# EAGLE board NodeGeneric (EAGLE 4.16)

Size 99.06 x 74.93 mm. Coordinates in mm from the lower left corner, seen from the top.
Outline: 0,0 0,74.93 99.06,74.93 99.06,0 0,0
Copper layers (1*16): Top 0.035mm / dielectric 1.5mm / Bottom 0.035mm
Design rules "8mils": minimum track width 10mil, minimum drill 24mil, track to track 8mil, track to pad 8mil, pad to pad 8mil, via to via 8mil, smd to smd 8mil, copper to edge 40mil, drill to drill 10mil, minimum pad ring 10mil, minimum via ring 8mil, stop-mask expansion 0mil, vias tented up to drill 0mil, thermal gap 10mil

## Footprints (pad centres in the part's own frame; a part is rotated, then mirrored left to right if it is on the bottom)
SOT223 = smd 1.219 x 2.235: 1 -2.311,-3.099; 2 0,-3.099; 3 2.311,-3.099 | smd 3.6 x 2.2: 4 0,3.099
C0603 = smd 1.1 x 1: 1 -0.85,0; 2 0.85,0
SANYO-OSCON_SMD_A5 = smd 2.6 x 1.6: + 1.8,0; - -1.8,0
SANYO-OSCON_SMD_C6 = smd 3.5 x 1.6: + 2.8,0; - -2.8,0
SANYO-OSCON_SMD_E7 = smd 4.15 x 1.9: + 3.5,0; - -3.5,0
LQFP48 = smd 0.65 x 2.4: 1 -7.62,-10.6; 2 -6.35,-10.6; 3 -5.08,-10.6; 4 -3.81,-10.6; 5 -2.54,-10.6; 6 -1.27,-10.6; 7 0,-10.6; 8 1.27,-10.6; 9 2.54,-10.6; 10 3.81,-10.6; 11 5.08,-10.6; 12 6.35,-10.6; 25 6.35,9.33; 26 5.08,9.33; 27 3.81,9.33; 28 2.54,9.33; 29 1.27,9.33; 30 0,9.33; 31 -1.27,9.33; 32 -2.54,9.33; 33 -3.81,9.33; 34 -5.08,9.33; 35 -6.35,9.33; 36 -7.62,9.33 | smd 2.4 x 0.65: 13 9.33,-7.62; 14 9.33,-6.35; 15 9.33,-5.08; 16 9.33,-3.81; 17 9.33,-2.54; 18 9.33,-1.27; 19 9.33,0; 20 9.33,1.27; 21 9.33,2.54; 22 9.33,3.81; 23 9.33,5.08; 24 9.33,6.35; 37 -10.6,6.35; 38 -10.6,5.08; 39 -10.6,3.81; 40 -10.6,2.54; 41 -10.6,1.27; 42 -10.6,0; 43 -10.6,-1.27; 44 -10.6,-2.54; 45 -10.6,-3.81; 46 -10.6,-5.08; 47 -10.6,-6.35; 48 -10.6,-7.62
SSOP28 = smd 0.4 x 1.5: 1 -4.225,-3.625; 2 -3.575,-3.625; 3 -2.925,-3.625; 4 -2.275,-3.625; 5 -1.625,-3.625; 6 -0.975,-3.625; 7 -0.325,-3.625; 8 0.325,-3.625; 9 0.975,-3.625; 10 1.625,-3.625; 11 2.275,-3.625; 12 2.925,-3.625; 13 3.575,-3.625; 14 4.225,-3.625; 15 4.225,3.625; 16 3.575,3.625; 17 2.925,3.625; 18 2.275,3.625; 19 1.625,3.625; 20 0.975,3.625; 21 0.325,3.625; 22 -0.325,3.625; 23 -0.975,3.625; 24 -1.625,3.625; 25 -2.275,3.625; 26 -2.925,3.625; 27 -3.575,3.625; 28 -4.225,3.625
1X02 = drill 1.016 long: 1 -1.27,0; 2 1.27,0
JTAG-ARM = drill 0.914 round: 1 -11.43,-1.27 | drill 0.914 octagon: 2 -11.43,1.27; 3 -8.89,-1.27; 4 -8.89,1.27; 5 -6.35,-1.27; 6 -6.35,1.27; 7 -3.81,-1.27; 8 -3.81,1.27; 9 -1.27,-1.27; 10 -1.27,1.27; 11 1.27,-1.27; 12 1.27,1.27; 13 3.81,-1.27; 14 3.81,1.27; 15 6.35,-1.27; 16 6.35,1.27; 17 8.89,-1.27; 18 8.89,1.27; 19 11.43,-1.27; 20 11.43,1.27
CHIPLED_0603 = smd 0.8 x 0.8: A 0,-0.75; C 0,0.75
05P = drill 0.914 long: 1 -5.08,0; 2 -2.54,0; 3 0,0; 4 2.54,0; 5 5.08,0
HC49/S = drill 0.813 round: 1 -2.413,0; 2 2.413,0
R0603 = smd 1 x 1.1: 1 -0.85,0; 2 0.85,0
SOT23 = smd 1 x 1.4: 1 -0.95,-1.1; 2 0.95,-1.1; 3 0,1.1
QFN32 = smd 0.711 x 0.279: 1 -2.376,1.75; 2 -2.376,1.25; 3 -2.376,0.75; 4 -2.376,0.25; 5 -2.376,-0.25; 6 -2.376,-0.75; 7 -2.376,-1.25; 8 -2.376,-1.75; 17 2.376,-1.75; 18 2.376,-1.25; 19 2.376,-0.75; 20 2.376,-0.25; 21 2.376,0.25; 22 2.376,0.75; 23 2.376,1.25; 24 2.376,1.75 | smd 0.279 x 0.711: 9 -1.75,-2.376; 10 -1.25,-2.376; 11 -0.75,-2.376; 12 -0.25,-2.376; 13 0.25,-2.376; 14 0.75,-2.376; 15 1.25,-2.376; 16 1.75,-2.376; 25 1.75,2.376; 26 1.25,2.376; 27 0.75,2.376; 28 0.25,2.376; 29 -0.25,2.376; 30 -0.75,2.376; 31 -1.25,2.376; 32 -1.75,2.376 | smd 2.54 x 2.54: EXP 0,0
USB_MINI_B = smd 2.286 x 0.508: P$1 1.14,1.6; P$2 1.14,0.8; P$3 1.14,0; P$4 1.14,-0.8; P$5 1.14,-1.6 | hole 1.016: -1.2,2.2; -1.2,-2.2

## Placement (x,y rotation side)
B_CH1  BSP75N  [SOT223]  86.23,6.73 90 top
B_CH2  BSP75N  [SOT223]  76.58,6.73 90 top
C1  100nF  [C0603]  38.23,11.68 90 top
C2  39pF  [C0603]  57.28,24.26 270 top
C3  39pF  [C0603]  57.28,19.43 90 top
C4  10nF  [C0603]  8.51,39.5 0 bottom
C5  47pF  [C0603]  8.51,34.67 0 bottom
C6  47pF  [C0603]  8.51,36.96 0 bottom
C7  100nF  [C0603]  16.64,40.01 0 top
C8  100nF  [C0603]  16.64,37.72 180 top
C9  4.7uF  [SANYO-OSCON_SMD_A5]  12.57,39.88 270 top
C10  10uF  [SANYO-OSCON_SMD_C6]  6.35,4.7 0 top
C11  47uF  [SANYO-OSCON_SMD_E7]  6.99,13.46 0 top
C12  470uF  [SANYO-OSCON_SMD_E7]  7.11,22.73 0 top
C13  10nF  [C0603]  4.83,29.21 180 top
C14  100nF  [C0603]  43.43,16.38 90 top
C15  100nF  [C0603]  40.89,16.38 270 top
C16  100nF  [C0603]  58.8,29.21 90 top
C17  100nF  [C0603]  56.26,29.21 270 top
C18  100nF  [C0603]  29.97,29.97 270 top
G_CH1  BSP75N  [SOT223]  86.23,14.86 90 top
G_CH2  BSP75N  [SOT223]  76.58,14.86 90 top
IC1  LPC2103  [LQFP48]  43.56,30.86 0 top
IC2  FT232RL  [SSOP28]  22.99,36.83 90 top
IC4  [SOT223]  17.78,4.7 270 top
IC5  [SOT223]  17.78,13.46 270 top
JP1  [1X02]  13.34,28.96 0 top
JP2  [1X02]  54.99,43.81 0 top
JTAG  JTAG-ARM  [JTAG-ARM]  44.58,5.08 180 top
LED_GREEN  [CHIPLED_0603]  16.13,35.31 270 top
LED_RED  [CHIPLED_0603]  16.13,33.02 270 top
LM1  [05P]  94.49,21.72 270 top
LM2  [05P]  94.49,8.13 270 top
Q1  14.7456MHz  [HC49/S]  61.21,20.95 270 top
R1  0  [R0603]  61.59,4.95 90 top
R2  100k  [R0603]  53.47,11.68 90 top
R3  100k  [R0603]  50.93,11.68 90 top
R4  100k  [R0603]  48.39,11.68 90 top
R5  100k  [R0603]  43.31,11.68 90 top
R6  100k  [R0603]  40.77,11.68 270 top
R7  100k  [R0603]  45.85,11.68 270 top
R8  10k  [R0603]  35.69,11.68 270 top
R9  10k  [R0603]  33.15,11.68 270 top
R10  10k  [R0603]  30.61,11.68 90 top
R11  270R  [R0603]  12.95,33.02 180 top
R12  270R  [R0603]  12.95,35.31 180 top
R13  22k  [R0603]  46.48,43.81 0 top
R14  390  [R0603]  16.13,24.26 0 top
R15  240  [R0603]  16,20.7 0 top
R16  100  [R0603]  20.95,23.88 0 top
R17  220  [R0603]  21.21,20.83 0 top
R_CH1  BSP75N  [SOT223]  86.23,22.99 90 top
R_CH2  BSP75N  [SOT223]  76.58,22.99 90 top
U$1  MPC130T  [SOT23]  27.43,11.43 180 top
U$2  MC13202  [QFN32]  60.73,54.25 0 top
U$8  USB_MINI_B  [USB_MINI_B]  6.6,36.96 0 top

## Library data of the parts
B_CH1 B_CH2 G_CH1 G_CH2 IC1 IC4 IC5 R_CH1 R_CH2 U$1 U$2 = my-library
C1-C18 R1-R17 = rcl
IC2 = ftdichip
JP1 JP2 = pinhead
JTAG = philips-6
LED_GREEN LED_RED = led
LM1 LM2 = con-amp-quick
Q1 = crystal
U$8 = mgs

## Nets
+1V8: C10.+ C14.2 C15.1 IC1.5 IC5.2 R17.1
+3V3: C1.1 C11.+ C16.1 C17.2 IC1.17 IC1.40 IC4.2 JP2.2 JTAG.1 R1.2 R2.2 R3.2 R4.2 R5.2 R6.2 R10.1 R15.1 U$1.2
+5V: C4.1 C8.1 C9.+ IC2.20 JP1.1 R11.2 R12.2 U$8.P$1
+12V: LM1.1 LM2.1
CTS#: IC1.35 IC2.11
DBGSEL: IC1.27 JP2.1 R13.2
GND: B_CH1.3 B_CH2.3 C1.2 C2.1 C3.2 C4.2 C5.2 C6.2 C7.1 C8.2 C9.- C10.- C11.- C12.- C13.2 C14.1 C15.2 C16.2 C17.1 C18.2 G_CH1.3 G_CH2.3 IC1.7 IC1.19 IC1.31 IC1.43 IC2.7 IC2.18 IC2.21 IC2.25 IC2.26 JTAG.4 JTAG.6 JTAG.8 JTAG.10 JTAG.12 JTAG.14 JTAG.16 JTAG.18 JTAG.20 R7.1 R8.1 R9.1 R13.1 R14.1 R16.1 R_CH1.3 R_CH2.3 U$1.3 U$2.EXP U$8.P$5
GND1: U$2.7
N$1: JTAG.2 R1.1
N$2: C2.2 IC1.12 Q1.1
N$3: JTAG.17 R8.2
N$4: JTAG.19 R9.2
N$5: C3.1 IC1.11 Q1.2
N$6: LM1.2 R_CH1.2
N$7: G_CH1.2 LM1.3
N$8: B_CH1.2 LM1.4
N$9: IC5.1 R16.2 R17.2
N$10: IC2.22 LED_GREEN.C
N$11: LED_GREEN.A R12.1
N$12: LED_RED.A R11.1
N$13: IC2.23 LED_RED.C
N$14: C7.2 IC2.4 IC2.17 IC2.19
N$15: LM2.2 R_CH2.2
N$16: G_CH2.2 LM2.3
N$17: B_CH2.2 LM2.4
N$18: C12.+ IC4.3 IC5.3
N$19: C18.1 IC1.42
N$20: C13.1 JP1.2
N$21: IC4.1 R14.2 R15.2
PWM_B_CH1: B_CH1.1 IC1.28
PWM_B_CH2: B_CH2.1 IC1.46
PWM_G_CH1: G_CH1.1 IC1.23
PWM_G_CH2: G_CH2.1 IC1.41
PWM_R_CH1: IC1.21 R_CH1.1
PWM_R_CH2: IC1.37 R_CH2.1
RST#: IC1.6 IC2.12 JTAG.15 R10.2 U$1.1
RTCK: IC1.26 JTAG.11 R5.1
RTS#: IC1.36 IC2.3
RXD: IC1.29 IC2.5
TCK: IC1.10 JTAG.9 R7.2
TDI: IC1.15 JTAG.5 R3.1
TDO: IC1.16 JTAG.13 R6.1
TMS: IC1.9 JTAG.7 R4.1
TRST: IC1.8 JTAG.3 R2.1
TXD: IC1.30 IC2.1
USBDM: C6.1 IC2.16 U$8.P$2
USBDP: C5.1 IC2.15 U$8.P$3
UV_CH1: LM1.5
UV_CH2: LM2.5

## Tracks (layer width: path | path; a pad name or v marks a point on that pad's centre or on a via)
+1V8  (5 unrouted)
+3V3  (17 unrouted)
+5V  (7 unrouted)
+12V  (1 unrouted)
CTS#  (1 unrouted)
DBGSEL  (2 unrouted)
GND  (50 unrouted)
N$1  (1 unrouted)
N$2  (2 unrouted)
N$3  (1 unrouted)
N$4  (1 unrouted)
N$5  (2 unrouted)
N$6  (1 unrouted)
N$7  (1 unrouted)
N$8  (1 unrouted)
N$9  (2 unrouted)
N$10  (1 unrouted)
N$11  (1 unrouted)
N$12  (1 unrouted)
N$13  (1 unrouted)
N$14  (3 unrouted)
N$15  (1 unrouted)
N$16  (1 unrouted)
N$17  (1 unrouted)
N$18  (2 unrouted)
N$19  (1 unrouted)
N$20  (1 unrouted)
N$21  (2 unrouted)
PWM_B_CH1  (1 unrouted)
PWM_B_CH2  (1 unrouted)
PWM_G_CH1  (1 unrouted)
PWM_G_CH2  (1 unrouted)
PWM_R_CH1  (1 unrouted)
PWM_R_CH2  (1 unrouted)
RST#  (4 unrouted)
RTCK  (2 unrouted)
RTS#  (1 unrouted)
RXD  (1 unrouted)
TCK  (2 unrouted)
TDI  (2 unrouted)
TDO  (2 unrouted)
TMS  (2 unrouted)
TRST  (2 unrouted)
TXD  (1 unrouted)
USBDM  (2 unrouted)
USBDP  (2 unrouted)